# Altium PCB PCB_RGBlimp-Q.pcbdoc (part 2 of 2)
Units mil, origin at the board's own origin, x right, y up, seen from the top; angles counter-clockwise.
Board outline 4269.68 x 4108.26 mil, 2 copper layers (Top Layer, Bottom Layer); 33 components, 48 nets, 199 pads, 83 vias.
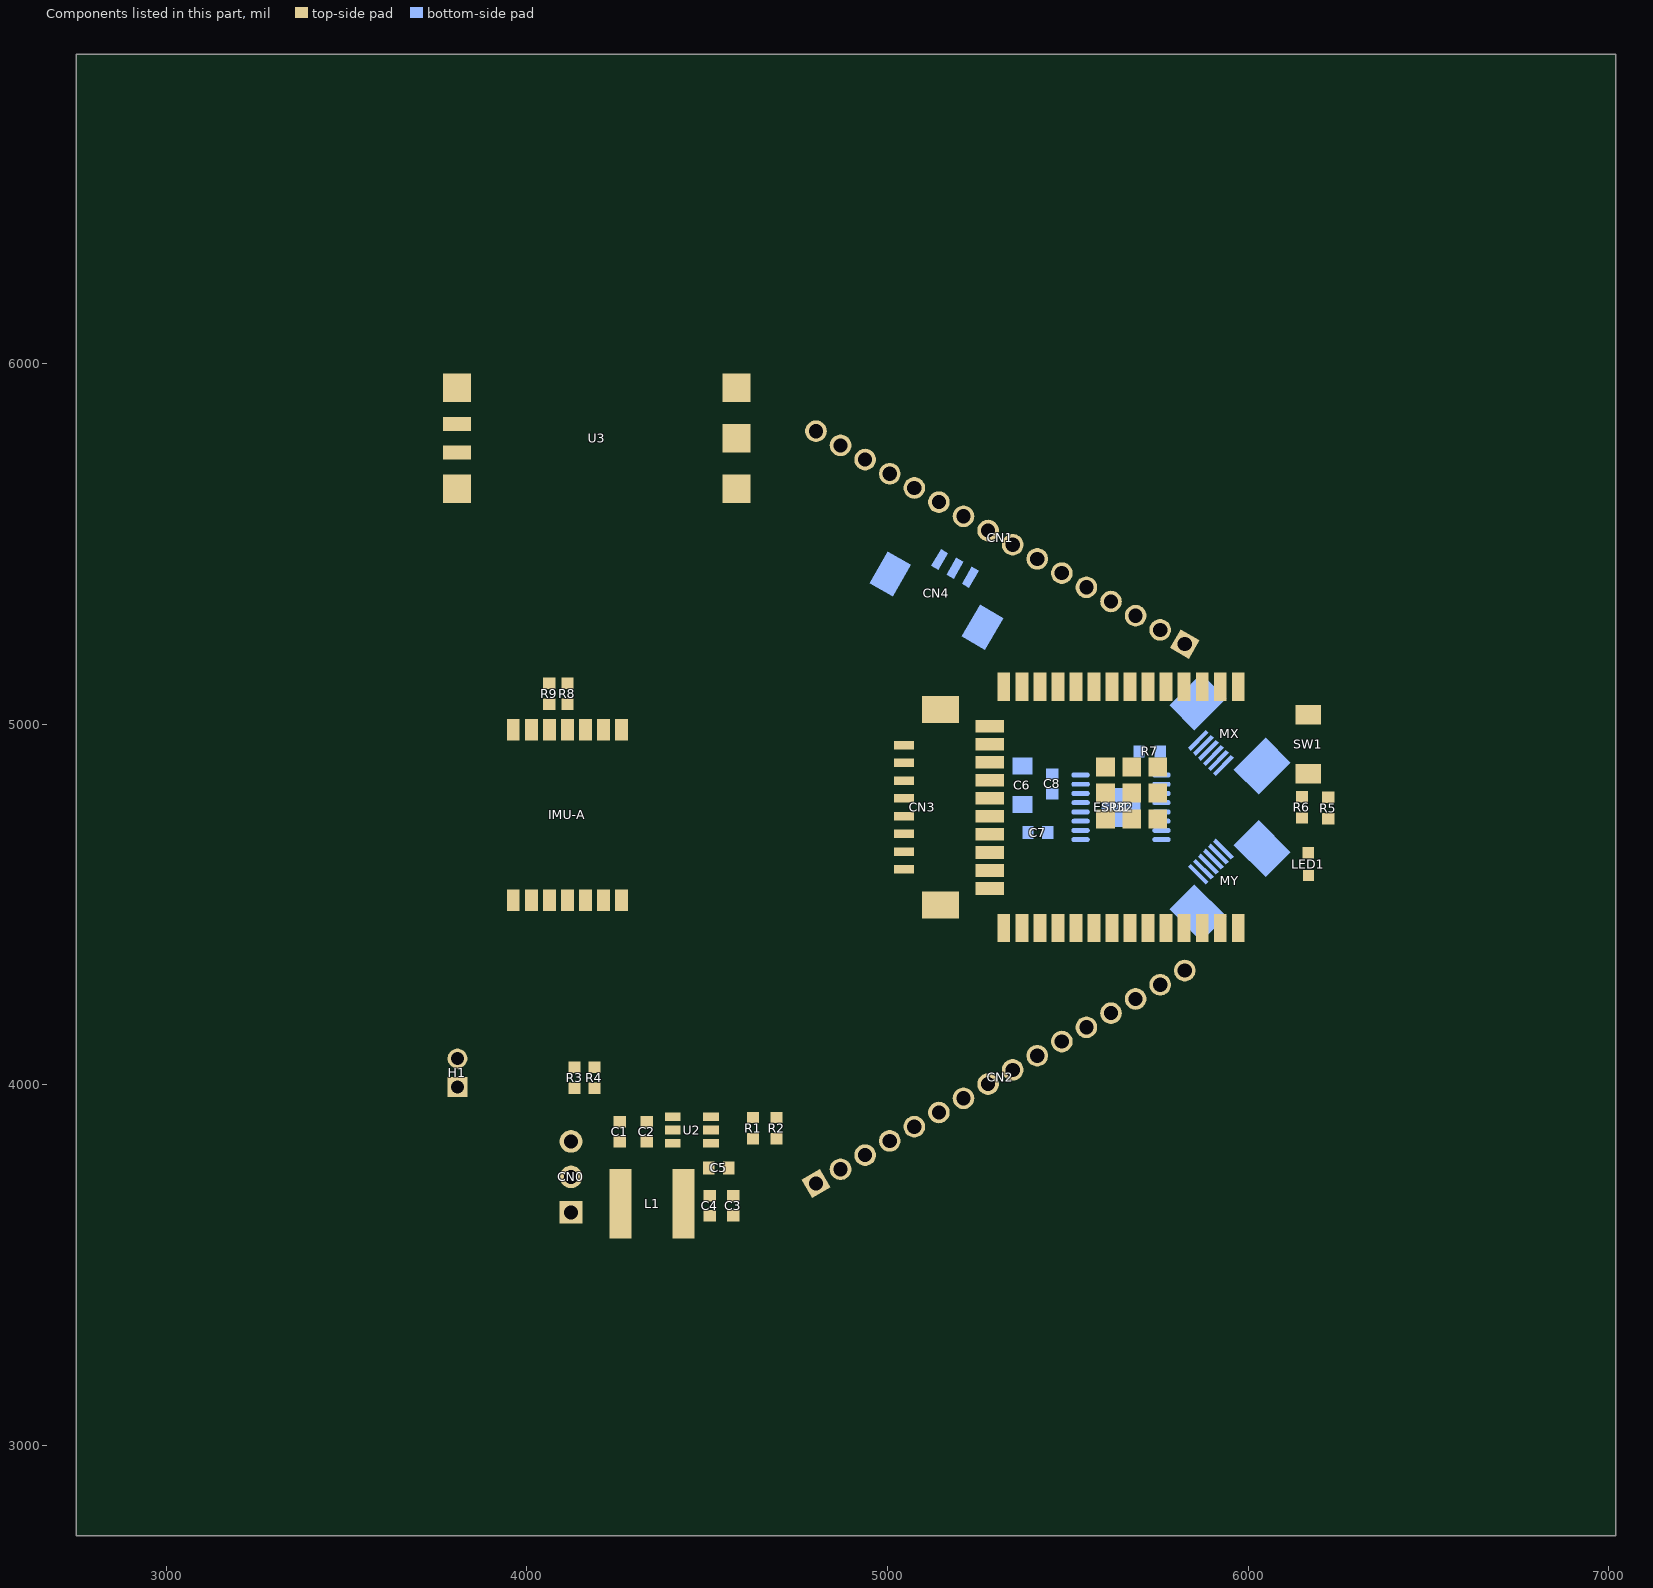
[diagram p2: the components of this part, seen from the top]

## Silkscreen, mask and mechanical layers (free items; w line width, h text height)
Top Silkscreen Layer:
  lines w7.87: 6395.07,4695.44 6395.07,4770.24 ; 6395.07,4769.68 6467.89,4769.68 6422.69,4769.68
  lines w10: 4976.97,4559.82 cw(c4742.12,4769.68) 4976.97,4979.55 ; 4978.34,4561.02 4978.34,4978.34 ; 4267.12,5097.24 4975.78,5097.24 4975.78,5569.68 4267.12,5569.68 4267.12,5097.24 ; 4269.68,3970.47 4978.34,3970.47 4978.34,4442.91 4269.68,4442.91 4269.68,3970.47
  text "C" at 4641.16,5940.93 h22.42 r270
  text "B" at 4641.13,5805.11 h22.42 r270
  text "G" at 4747.09,5747.84 h33.63 r330
  text "13" at 4805.64,5712.53 h33.91 r330
  text "12" at 4877.65,5671.59 h33.91 r330
  text "A" at 4641.13,5659.44 h22.42 r270
  text "14" at 4943.44,5633.79 h33.91 r330
  text "27" at 5007.65,5596.59 h33.91 r330
  text "Cheng Hao" at 4073.88,5564.75 h37.68 r270
  text "20231202" at 3980.47,5564.32 h37.68 r270
  text "PKU" at 4154.76,5562.6 h56.52 r270
  text "26" at 5077.3,5557.02 h33.91 r330
  text "25" at 5144.22,5517.65 h33.91 r330
  text "33" at 5213.12,5478.28 h33.91 r330
  text "32" at 5282.02,5438.91 h33.91 r330
  text "35" at 5350.92,5399.54 h33.91 r330
  text "34" at 5415.88,5362.14 h33.91 r330
  text "G" at 5501.02,5312.8 h33.63 r330
  text "Motor-X" at 4537.1,5312.24 h56.52
  text "V" at 5567.95,5273.43 h33.63 r330
  text "39" at 5620.6,5244.03 h33.91 r330
  text "36" at 5687.53,5204.66 h33.91 r330
  text "EN" at 5756.43,5165.29 h33.91 r330
  text "C" at 4992.12,4930.73 h26.16
  text "B" at 4992.12,4877.56 h26.16
  text "A" at 4992.14,4826.37 h26.16
  text "X" at 6479.71,4777.55 h22.42 r270
  text "V" at 4992.16,4777.18 h26.16
  text "3" at 4992.16,4727.97 h26.16
  text "Y" at 6378.72,4683.62 h22.42 r270
  text "G" at 4992.14,4678.74 h26.16
  text "IO2" at 6216.26,4650.41 h30.14 r270
  text "R" at 4992.15,4631.5 h26.16
  text "T" at 4992.17,4582.3 h26.16
  text "RGBlimp-Q" at 3979.56,4456.37 h56.52 r270
  text "23" at 5772.22,4341.96 h33.91 r30
  text "22" at 5709.23,4306.52 h33.91 r30
  text "TX" at 5634.43,4263.22 h33.91 r30
  text "RX" at 5569.47,4225.81 h33.91 r30
  text "21" at 5504.51,4188.4 h33.91 r30
  text "Motor-Y" at 4537.04,4180.35 h56.52
  text "19" at 5435.64,4149.01 h33.91 r30
  text "VIN" at 3858,4113.01 h30.14 r270
  text "18" at 5366.75,4109.65 h33.91 r30
  text "5" at 5311.99,4078.51 h33.63 r30
  text "GND" at 3858,4036.24 h30.14 r270
  text "17" at 5230.92,4030.91 h33.91 r30
  text "16" at 5163.97,3991.55 h33.91 r30
  text "4" at 5103.3,3956.5 h33.63 r30
  text "0" at 5038.34,3919.1 h33.63 r30
  text "2" at 4969.45,3879.73 h33.63 r30
  text "VIN" at 4170.99,3878.76 h30.14 r270
  text "15" at 4890.34,3834.08 h33.91 r30
  text "V" at 4831.65,3800.99 h33.63 r30
  text "G" at 4762.75,3763.59 h33.63 r30
  text "GND" at 4170.99,3687.81 h30.14 r270
Bottom Silkscreen Layer:
  circle w11.81: c4742.12,4769.68 r511.81
  circle w7.87: c4417.32,5332.24 r177.17
  circle w7.87: c4417.32,4207.1 r177.17
  lines w7.87: 4742.12,3938.97 4742.12,4769.68 5293.3,4769.68 ; 5805.11,4769.68 6198.81,4769.68
  lines w10: 3935.22,3584.84 3954.71,3604.33 ; 3954.13,6133.85 4124.61,6035.44 ; 3954.73,3407.48 3954.71,3604.33 ; 3974.2,3584.84 3954.71,3604.33 ; 4097.99,6028.3 4124.61,6035.44 ; 4117.48,6062.06 4124.61,6035.44 ; 6154.17,4841.48 6147.03,4868.1 ; 6173.65,4875.23 6147.03,4868.1 ; 6317.52,4769.69 6147.03,4868.1
  text "C" at 3950.39,6183.07 h37.37 r30
  text "G" at 4774.05,5775.78 h33.63 r150
  text "13" at 4837.45,5742.68 h33.91 r150
  text "12" at 4908.31,5699.37 h33.91 r150
  text "14" at 4973.27,5661.97 h33.91 r150
  text "27" at 5040.2,5624.57 h33.91 r150
  text "26" at 5107.13,5587.17 h33.91 r150
  text "25" at 5174.06,5547.8 h33.91 r150
  text "33" at 5242.96,5508.43 h33.91 r150
  text "25" at 5104.88,5506.93 h22.61 r150
  text "32" at 5313.82,5467.09 h33.91 r150
  text "35" at 5380.75,5429.69 h33.91 r150
  text "G" at 5306.06,5392.51 h22.42 r150
  text "34" at 5447.68,5392.28 h33.91 r150
  text "G" at 5529.96,5340.74 h33.63 r150
  text "V" at 5596.89,5299.4 h33.63 r150
  text "MX" at 4102.32,5286.56 h56.52 r270
  text "39" at 5650.44,5274.17 h33.91 r150
  text "36" at 5717.37,5234.8 h33.91 r150
  text "EN" at 5788.23,5195.43 h33.91 r150
  text "X" at 6199.6,4757.87 h37.37 r270
  text "A" at 6343.3,4755.9 h37.37 r270
  text "RGBlimp-Q" at 3940.9,4559.38 h56.52 r270
  text "23" at 5831.47,4370.02 h33.91 r30
  text "22" at 5768.48,4334.58 h33.91 r30
  text "TX" at 5695.64,4293.24 h33.91 r30
  text "RX" at 5626.74,4253.87 h33.91 r30
  text "21" at 5549.97,4210.57 h33.91 r30
  text "19" at 5481.07,4171.2 h33.91 r30
  text "MY" at 4102.32,4152.71 h56.52 r270
  text "18" at 5416.11,4133.8 h33.91 r30
  text "5" at 5340.98,4090.36 h33.63 r30
  text "17" at 5276.35,4051.12 h33.91 r30
  text "16" at 5209.42,4011.75 h33.91 r30
  text "4" at 5138.23,3970.28 h33.63 r30
  text "0" at 5069.33,3930.91 h33.63 r30
  text "Y" at 4699.61,3893.7 h37.37 r270
  text "2" at 5000.43,3891.54 h33.63 r30
  text "15" at 4939.74,3856.24 h33.91 r30
  text "V" at 4864.61,3812.8 h33.63 r30
  text "VIN" at 3791.31,3798.2 h37.68 r270
  text "G" at 4795.71,3777.37 h33.63 r30
  text "GND" at 3791.31,3597.41 h37.68 r270
  text "B" at 3909.85,3324.81 h37.37 r330
Mechanical Layer:
  circle w1: c4860.23,4565.11 r19.68
  circle w1: c4860.23,4974.25 r19.68
  circle w1: c4742.12,4769.68 r98.42
  circle w1: c4505.9,4769.68 r19.68
  circle w1: c3954.72,6133.5 r39.37
  circle w1: c3954.72,3405.86 r39.37
  circle w1: c6316.92,4769.68 r39.37
  circle w1: c6316.92,4651.57 r19.68
  circle w1: c3852.43,6074.44 r19.68
  circle w1: c6316.92,4887.79 r19.68
  circle w1: c3852.43,3464.92 r19.68
  circle w1: c4057.01,3346.81 r19.68
  circle w1: c4057.01,6192.55 r19.68
  circle w1: c4417.32,5332.25 r78.74
  circle w1: c4318.89,5155.11 r23.62
  circle w1: c4318.89,5509.44 r23.62
  circle w1: c4795.27,5509.44 r23.62
  circle w1: c4417.32,4207.1 r78.74
  circle w1: c4318.89,4384.25 r23.62
  circle w1: c4318.89,4029.92 r23.62
  circle w1: c4795.27,4029.92 r23.62
  circle w1: c3895.67,6235.82 r19.68
  circle w1: c3895.67,3303.54 r19.68
  circle w1: c6435.03,4769.68 r19.68

## Text inside footprints (layer, text, board x,y; h text height)
IMU-A: Top Silkscreen Layer "X" at 4094.81,4610.66 h37.37 r270; Top Silkscreen Layer "Y" at 4252.3,4787.83 h37.37 r270